# Altium PCB PCB.PcbDoc
Units mm, origin at the board's own origin, x right, y up, seen from the top; angles counter-clockwise.
Board outline 100 x 47.5 mm, 4 copper layers (Top Layer, 3V3, GND, Bottom Layer), stack 0.569 mm thick; 123 components, 61 nets, 455 pads, 146 vias.
Unrouted connection lines stored in the file: 1.
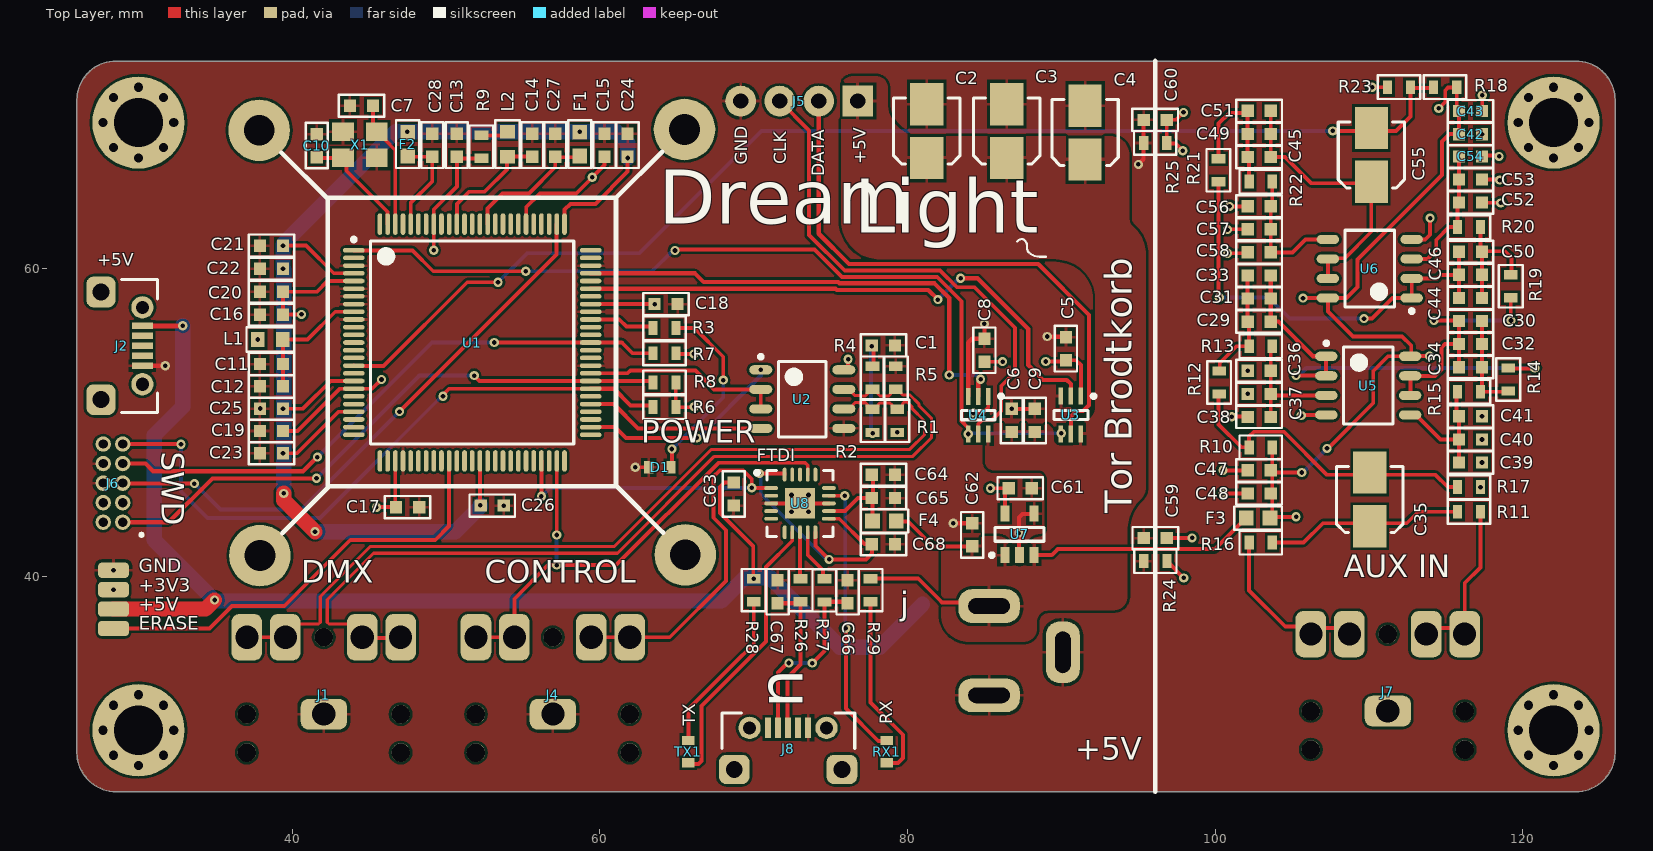
[diagram p0: Top Layer view]
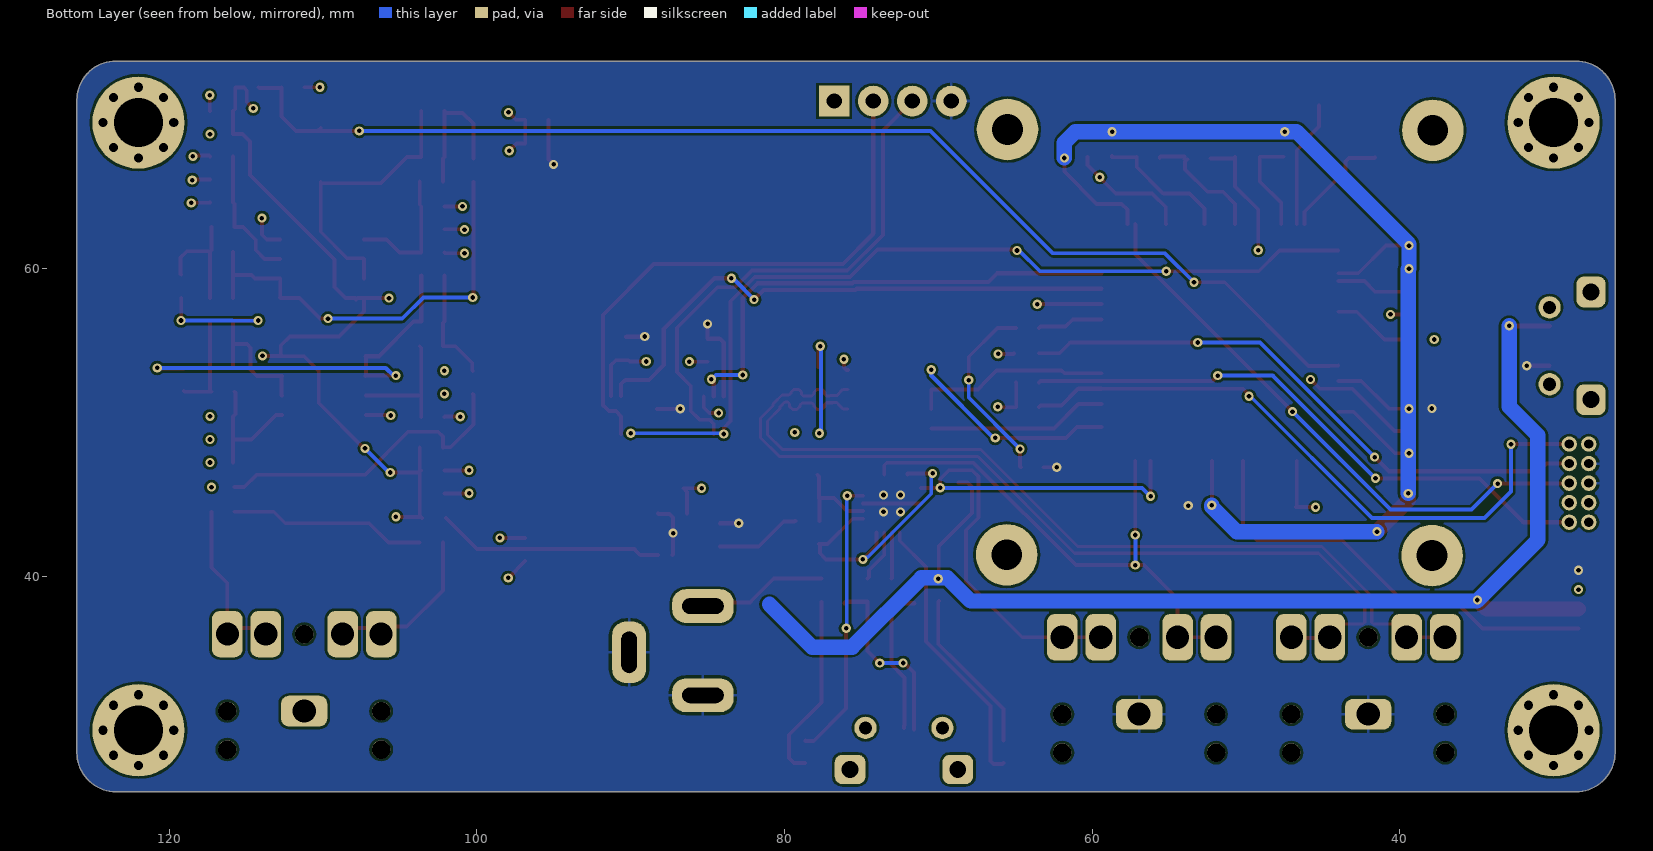
[diagram p1: Bottom Layer view, seen from below]
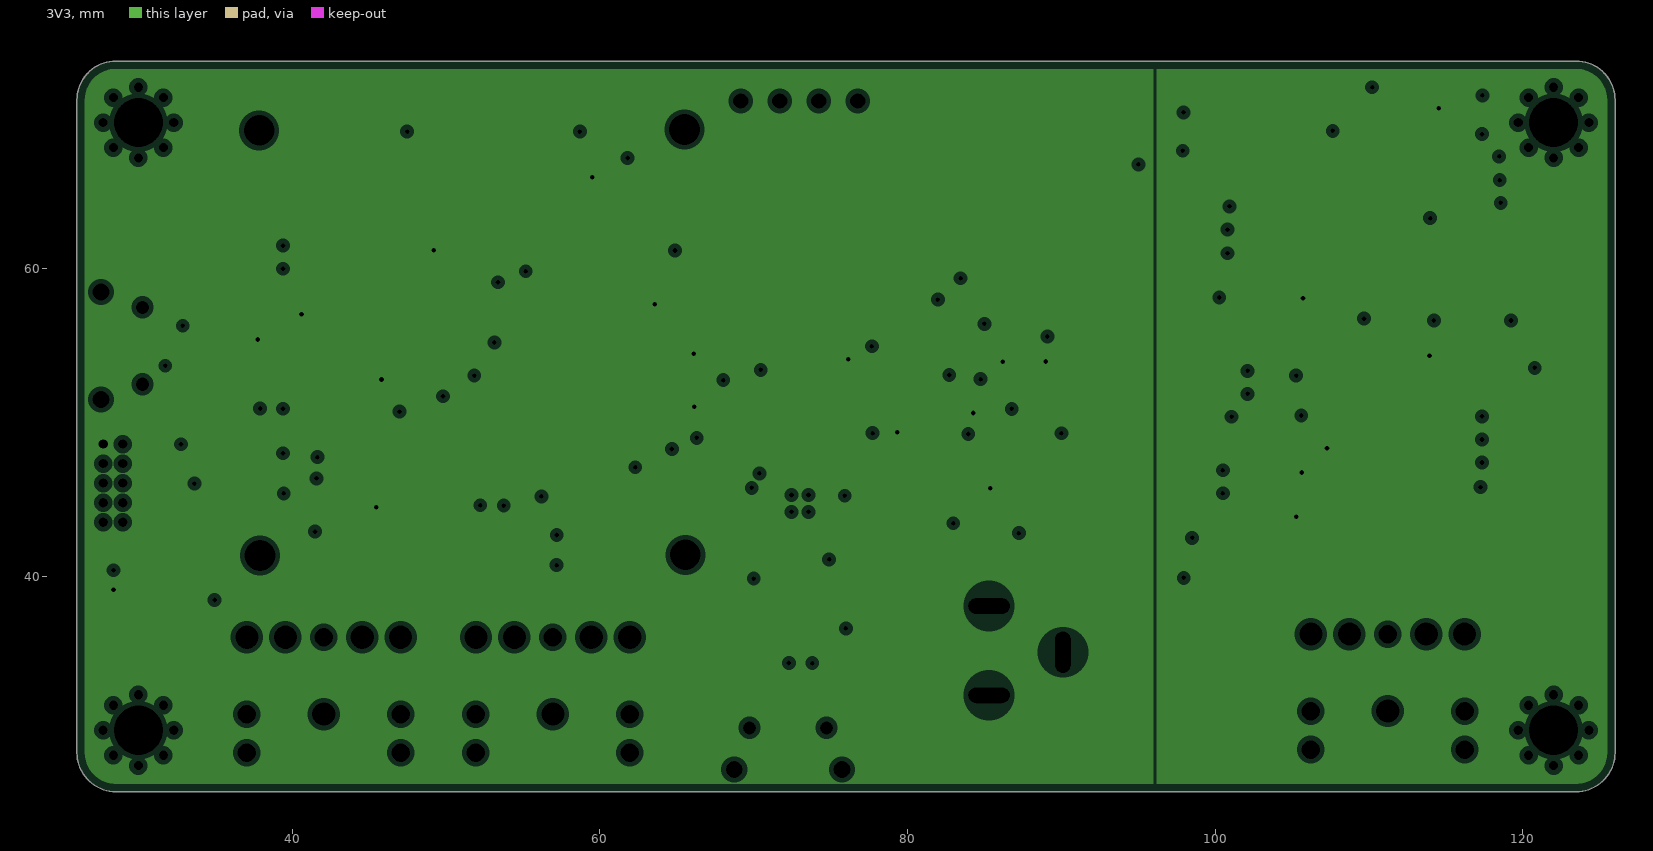
[diagram p2: 3V3, clearances drawn from the general rule]
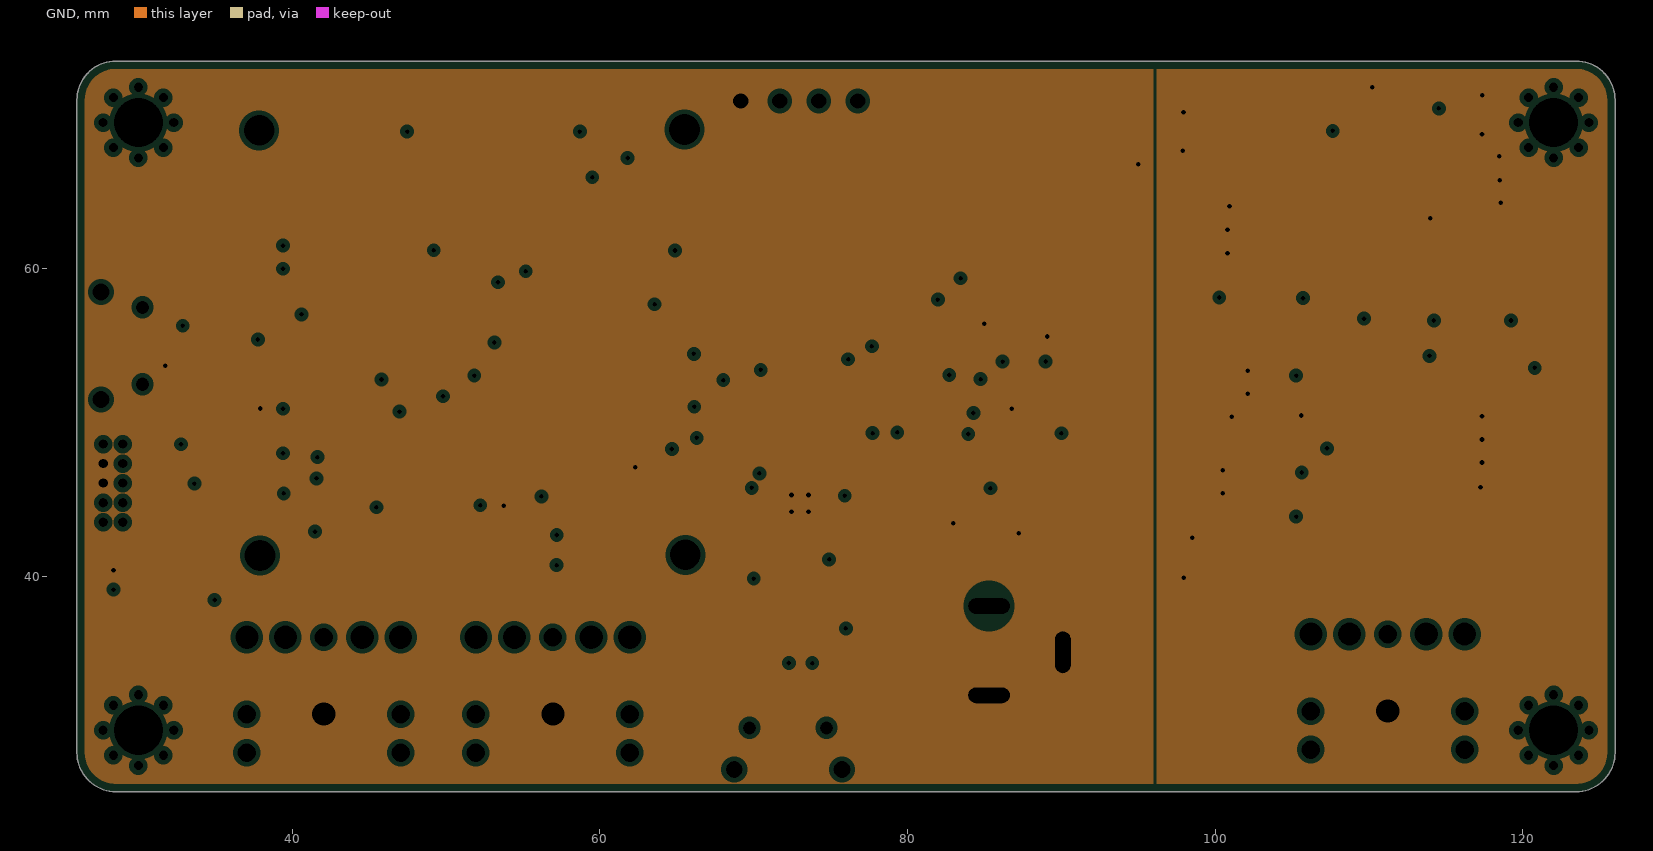
[diagram p3: GND, clearances drawn from the general rule]
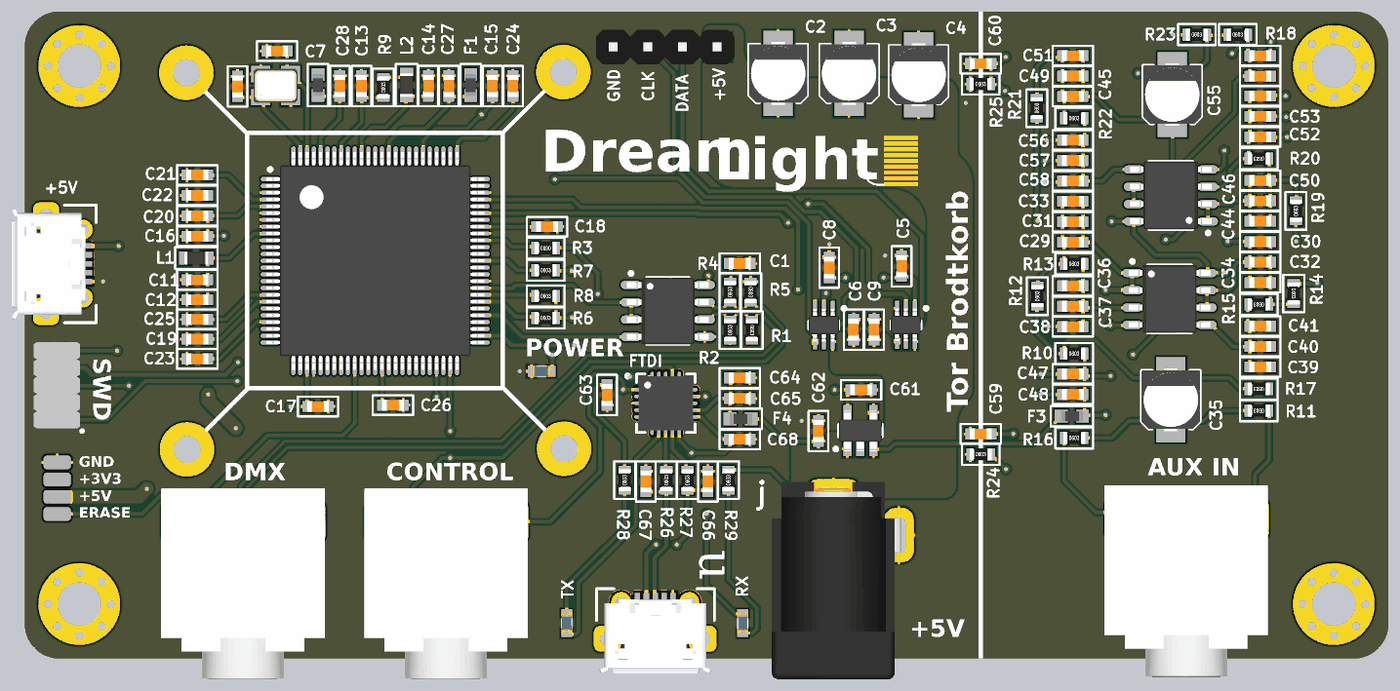
[diagram p4: 3D render of the assembled board from above, using the file's embedded part models]

## Layer stack, top to bottom
Top Solder: solder mask 0.0102, Solder Resist, Dk 3.5
Top Layer: signal copper 0.0356
Dielectric 2: prepreg 0.0711, PP-006, Dk 4.1
3V3: plane copper 0.0178, net (Multiple Nets)
Dielectric 1: dielectric 0.32, FR-4, Dk 4.8
GND: plane copper 0.0178, net (Multiple Nets)
Dielectric 3: prepreg 0.0711, PP-006, Dk 4.1
Bottom Layer: signal copper 0.0356
Bottom Solder: solder mask 0.0102, Solder Resist, Dk 3.5

## Board outline
123.46,26 ccw(c123.46,28.54) 126,28.54 126,70.96 ccw(c123.46,70.96) 123.46,73.5 28.54,73.5 ccw(c28.54,70.96) 26,70.96 26,28.54 ccw(c28.54,28.54) 28.54,26

## Design rules (kind name [scope] priority, off if disabled: settings)
Clearance [All] p1: gap=0.16 ignorepadtopadclearanceinfootprint=FALSE except(0: Arc-Text Arc-Hole Track-Text Track-Hole SMDPad-Text SMDPad-Hole THPad-Text THPad-Hole Via-Text Via-Hole Fill-Text Fill-Hole Poly-Text Poly-Hole Region-Text Region-Hole Text-Text Text-Hole)
DiffPairsRouting [All] p1: maxlimit=0.254 minlimit=0.254 mostfreqgap=0.254 toplayer_minwidth=0.16 toplayer_maxwidth=0.381 toplayer_prefwidth=0.2 bottomlayer_minwidth=0.16 bottomlayer_maxwidth=0.381 bottomlayer_prefwidth=0.2 maxuncoupledlength=12.7
Height [All] p1: minheight=0 maxheight=200 prefheight=12.7
HoleSize [All] p1: absolutevalues=TRUE maxlimit=6.35 minlimit=0.3 maxpercent=80.000 minpercent=20.000
MinimumSolderMaskSliver [All] p1: minsoldermaskwidth=0.1
PlaneClearance [All] p1: clearance=0.3
PlaneConnect [All] p1: planeconnectstyle=Relief reliefexpansion=0.508 reliefentries=4 reliefconductorwidth=1 reliefairgap=0.254
PolygonConnect PolygonConnect_1 [IsVia] p1: connectstyle=Direct reliefconductorwidth=0.254 reliefentries=4 polygonreliefangle="90 Angle" airgapwidth=0.254
PolygonConnect [All] p2: connectstyle=Relief reliefconductorwidth=0.2 reliefentries=4 polygonreliefangle="90 Angle" airgapwidth=0.2
RoutingVias [All] p1: holewidth=0.3 width=0.6 viastyle="Through Hole" minholewidth=0.3 minwidth=0.6 maxholewidth=6.35 maxwidth=10
SilkToSolderMaskClearance [IsPad] p1: minsilkscreentomaskgap=0.178 clearancetoexposedcopper=TRUE
SolderMaskExpansion [All] p1: expansion=0.102
Width [All] p1: maxlimit=5 minlimit=0.16 preferedwidth=0.25 minimp=50.000000 maximp=50.000000 favimp=50.000000
23 further rules are at their usual default settings.

## Classes and differential pairs
net class SWD: NetJ6_2 NetJ6_4 NetJ6_6 NetJ6_10
component class "[08] - FTDI": C63 C64 C65 C66 C67 C68 F4 J8 R26 R27 R28 R29 RX1 TX1 U8
component class "[07] - POWER": C61 C62 U7
component class "[06] - AUDIO": C29 C30 C31 C32 C33 C34 C35 C36 C37 C38 C39 C40 C41 C42 C43 C44 C45 C46 C47 C48 C49 C50 C51 C52 C53 C54 C55 C56 C57 C58 C59 C60 F3 J7 R10 R11 R12 R13 R14 R15 R16 R17 R18 R19 R20 R21 R22 R23 R24 R25 U5 U6
component class "[05] - CPU - POWER": C13 C14 C15 C16 C17 C18 C19 C20 C21 C22 C23 C24 C25 C26 C27 C28 F1 F2 L2 R9 U1
component class "[04] - CPU - SIGNAL, USB, JTAG": C11 C12 J6 L1 R6 R7 R8
component class "[03] - CPU - IO": C1 C2 C3 C4 C5 C6 C7 C8 C9 C10 D1 j J1 J2 J4 J5 R1 R2 R3 R4 R5 U2 U3 U4 X1
differential pair DMX: +DMX_P -DMX_N

## Components (designator, comment, footprint, x,y, rotation, side; value= is the part's Value field where it differs from the comment)
C1 "02016D104KAT2A" C0603 78.43,55.01 r180 top value=100nF
C2 "EEE1HA2R2SR" "Capacitor electrolytic SMD 4x5.4" 81.25,68.95 r90 top value=10uF
C3 "EEE1HA2R2SR" "Capacitor electrolytic SMD 4x5.4" 86.45,68.95 r90 top value=10uF
C4 "EEE1HA2R2SR" "Capacitor electrolytic SMD 4x5.4" 91.55,68.85 r90 top value=10uF
C5 "02016D104KAT2A" C0603 90.3,54.8 r270 top value=100nF
C6 "02016D104KAT2A" C0603 86.78,50.14 r90 top value=100nF
C7 "02016D104KAT2A" C0603 44.5,70.6 r180 top
C8 "02016D104KAT2A" C0603 85,54.7 r270 top value=100nF
C9 "02016D104KAT2A" C0603 88.28,50.14 r90 top value=100nF
C10 "02016D104KAT2A" C0603 41.6,68 r90 top
C11 "02016D104KAT2A" C0603 38.65,52.35 r0 top value=100nF
C12 "02016D104KAT2A" C0603 38.65,53.8 r0 top value=100nF
C13 "02016D104KAT2A" C0603 50.7,68.03 r270 top value=100nF
C14 "02016D104KAT2A" C0603 55.6,68.03 r270 top value=4.7uF
C15 "02016D104KAT2A" C0603 60.3,68.03 r270 top value=100nF
C16 "02016D104KAT2A" C0603 38.65,57 r0 top value=100nF
C17 "02016D104KAT2A" C0603 47.5,44.5 r180 top value=100nF
C18 "02016D104KAT2A" C0603 64.3,57.7 r180 top value=100nF
C19 "02016D104KAT2A" C0603 38.65,49.45 r0 top value=4.7uF
C20 "02016D104KAT2A" C0603 38.65,58.5 r0 top value=100nF
C21 "02016D104KAT2A" C0603 38.65,61.5 r0 top value=1uF
C22 "02016D104KAT2A" C0603 38.65,60 r0 top value=100nF
C23 "02016D104KAT2A" C0603 38.65,48 r0 top value=100nF
C24 "02016D104KAT2A" C0603 61.8,68.03 r270 top value=100nF
C25 "02016D104KAT2A" C0603 38.65,50.9 r0 top value=100nF
C26 "02016D104KAT2A" C0603 53,44.6 r180 top value=100nF
C27 "02016D104KAT2A" C0603 57.1,68.03 r270 top value=100nF
C28 "02016D104KAT2A" C0603 49.1,68.03 r270 top value=100nF
C29 "02016D104KAT2A" C0603 102.86,56.56 r0 top value=100nF
C30 "02016D104KAT2A" C0603 116.6,56.6 r180 top value=100nF
C31 "02016D104KAT2A" C0603 102.86,58.06 r0 top value=100nF
C32 "02016D104KAT2A" C0603 116.6,55.1 r180 top value=100nF
C33 "02016D104KAT2A" C0603 102.86,59.56 r0 top value=100nF
C34 "02016D104KAT2A" C0603 116.6,53.6 r180 top value=100nF
C35 "EEE1HA2R2SR" "Capacitor electrolytic SMD 4x5.4" 110.05,45 r90 top value=10uF
C36 "02016D104KAT2A" C0603 102.86,53.36 r0 top value=100nF
C37 "02016D104KAT2A" C0603 102.86,51.86 r0 top value=100nF
C38 "02016D104KAT2A" C0603 102.86,50.36 r0 top value=100nF
C39 "02016D104KAT2A" C0603 116.6,47.4 r180 top value=100nF
C40 "02016D104KAT2A" C0603 116.6,48.9 r180 top value=100nF
C41 "02016D104KAT2A" C0603 116.6,50.4 r180 top value=100nF
C42 "02016D104KAT2A" C0603 116.6,68.75 r180 top value=100nF
C43 "02016D104KAT2A" C0603 116.6,70.25 r180 top value=100nF
C44 "02016D104KAT2A" C0603 116.6,58.1 r180 top value=100nF
C45 "02016D104KAT2A" C0603 102.86,67.26 r0 top value=100nF
C46 "02016D104KAT2A" C0603 116.6,59.6 r180 top value=100nF
C47 "02016D104KAT2A" C0603 102.86,46.89 r0 top value=100nF
C48 "02016D104KAT2A" C0603 102.86,45.39 r0 top value=100nF
C49 "02016D104KAT2A" C0603 102.86,68.76 r0 top value=100nF
C50 "02016D104KAT2A" C0603 116.6,61.1 r180 top value=100nF
C51 "02016D104KAT2A" C0603 102.86,70.26 r0 top value=100nF
C52 "02016D104KAT2A" C0603 116.6,64.3 r180 top value=100nF
C53 "02016D104KAT2A" C0603 116.6,65.8 r180 top value=100nF
C54 "02016D104KAT2A" C0603 116.6,67.3 r180 top value=100nF
C55 "EEE1HA2R2SR" "Capacitor electrolytic SMD 4x5.4" 110.15,67.4 r90 top value=10uF
C56 "02016D104KAT2A" C0603 102.86,64.06 r0 top value=100nF
C57 "02016D104KAT2A" C0603 102.86,62.56 r0 top value=100nF
C58 "02016D104KAT2A" C0603 102.86,61.06 r0 top value=100nF
C59 "02016D104KAT2A" C0603 96.11,42.49 r0 top value=100nF
C60 "02016D104KAT2A" C0603 96.1,69.67 r0 top value=100nF
C61 "02016D104KAT2A" C0603 87.33,45.73 r180 top value=100nF
C62 "02016D104KAT2A" C0603 84.2,42.7 r270 top value=100nF
C63 "02016D104KAT2A" C0603 68.7,45.35 r90 top value=100nF
C64 "02016D104KAT2A" C0603 78.43,46.6 r180 top value=100nF
C65 "02016D104KAT2A" C0603 78.43,45.09 r180 top value=100nF
C66 "02016D104KAT2A" C0603 76.1,39 r270 top value=47pF
C67 "02016D104KAT2A" C0603 71.55,39 r270 top value=47pF
C68 "02016D104KAT2A" C0603 78.43,42.09 r180 top value=100nF
D1 "LED Blue" "L0603 BLUE" 63.9,47.09 r180 top
F1 "BLM18AG121SN1D" "Ferrite bead 0603" 58.7,68.1 r270 top value="470R @ 100MHz"
F2 "BLM18AG121SN1D" "Ferrite bead 0603" 47.5,68.1 r270 top value="470R @ 100MHz"
F3 "BLM18AG121SN1D" "Ferrite bead 0603" 102.79,43.79 r0 top value="470R @ 100MHz"
F4 "BLM18AG121SN1D" "Ferrite bead 0603" 78.5,43.6 r180 top value="470R @ 100MHz"
j "DC jack" "DC power jack" 90.1,24.466 r90 top
J1 "Audio Jack" "AUDIO JACK FLAT" 47.05,36.041 r90 top
J2 "USB micro" "USB micro" 28.06,54.97 r270 top
J4 "Audio Jack" "AUDIO JACK FLAT" 61.94,36.041 r90 top
J5 "349873-345-34_3" "HEADER 1X4 MALE" 69.15,70.9 r270 top
J6 "123-34-2234_11_1" "HEADER 2X5 MALE 1.27MM" 27.71,43.52 r0 top
J7 "Audio Jack" "AUDIO JACK FLAT" 116.22,36.24 r90 top
J8 "USB micro" "USB MICRO" 72.25,27.95 r0 top
L1 "MLZ1608A2R2WT" "Inductor 0603" 38.58,55.4 r0 top value=10mH
L2 "MLZ1608A2R2WT" "Inductor 0603" 54,68.1 r270 top value=10mH
R1 "CPF-A-0603B100KE1" R0603 79.33,50.11 r270 top value=1k
R2 "CPF-A-0603B100KE1" R0603 77.73,50.11 r90 top value=1k
R3 "CPF-A-0603B100KE1" R0603 64.2,56.135 r180 top value=1k
R4 "CPF-A-0603B100KE1" R0603 77.73,52.91 r90 top value=1k
R5 "CPF-A-0603B100KE1" R0603 79.23,52.91 r270 top value=1k
R6 "CPF-A-0603B100KE1" R0603 64.2,51 r0 top value=1k
R7 "CPF-A-0603B100KE1" R0603 64.2,54.5 r0 top value=1k
R8 "CPF-A-0603B100KE1" R0603 64.2,52.6 r0 top value=1k
R9 "CPF-A-0603B100KE1" R0603 52.3,67.93 r90 top value=1k
R10 "CPF-A-0603B100KE1" R0603 102.96,48.38 r0 top value=1k
R11 "CPF-A-0603B100KE1" R0603 116.5,44.2 r180 top value="0 Ohm"
R12 "CPF-A-0603B100KE1" R0603 100.26,52.6 r90 top value=1k
R13 "CPF-A-0603B100KE1" R0603 102.96,54.96 r0 top value=1k
R14 "CPF-A-0603B100KE1" R0603 119.05,52.8 r270 top value=1k
R15 "CPF-A-0603B100KE1" R0603 116.5,52 r180 top value=1k
R16 "CPF-A-0603B100KE1" R0603 102.96,42.19 r0 top value="0 Ohm"
R17 "CPF-A-0603B100KE1" R0603 116.5,45.8 r180 top value=1k
R18 "CPF-A-0603B100KE1" R0603 114.95,71.8 r0 top value=1k
R19 "CPF-A-0603B100KE1" R0603 119.22,58.86 r90 top value=1k
R20 "CPF-A-0603B100KE1" R0603 116.5,62.7 r180 top value=1k
R21 "CPF-A-0603B100KE1" R0603 100.22,66.4 r90 top value=1k
R22 "CPF-A-0603B100KE1" R0603 102.96,65.66 r0 top value=1k
R23 "CPF-A-0603B100KE1" R0603 111.95,71.8 r0 top value=1k
R24 "CPF-A-0603B100KE1" R0603 96.11,40.99 r0 top value=1k
R25 "CPF-A-0603B100KE1" R0603 96.1,68.17 r0 top value=1k
R26 "CPF-A-0603B100KE1" R0603 73.05,39.1 r90 top value=1k
R27 "CPF-A-0603B100KE1" R0603 74.6,39.09 r90 top value=1k
R28 "CPF-A-0603B100KE1" R0603 70,39.1 r90 top value=1k
R29 "CPF-A-0603B100KE1" R0603 77.6,39.1 r90 top value=1k
RX1 "LED Blue" "L0603 BLUE" 78.65,28.6 r90 top
TX1 "LED Blue" "L0603 BLUE" 65.75,28.6 r270 top
U1 "Cortex-M7 @ 300 MHz" ATSAMS70N19A-AN 51.7,55.2 r0 top
U2 "RS485 tranciever" SP3485EN 73.16,51.52 r0 top
U3 "Level shifter" ADG3301BKSZ 90.62,50.49 r270 top
U4 "Level shifter" ADG3301BKSZ 84.6,50.48 r270 top
U5 "LME49721MA/NOPB" LME49721MA/NOPB 109.95,52.4 r0 top
U6 "LME49721MA/NOPB" LME49721MA/NOPB 110.05,60 r180 top
U7 "LDO 3.3V" NCV8161BSN330T1G 87.28,42.73 r90 top
U8 "FTDI" FT231XQ-R 73.01,44.74 r0 top
X1 "12MHz" MCSJK-7U-12.00-12-30-80-B-30 43.3,67.2 r0 top

## Footprints (in the part's own frame and the unit in brackets; to place one, negate y for a bottom-side part, rotate by r counter-clockwise, add the part's x,y. Pads: shape width x height; smd on the part's side, far side on the other; paste and mask are expansions set on the pad)
ADG3301BKSZ [mm] "SOT23, 6-Leads, Body 2,00x2,10mm, Pitch 0,65mm, IPC Low Density"
  rect 1.1x0.3 smd: 1(-1.225,0.65) 2(-1.225,0) 3(-1.225,-0.65) 4(1.225,-0.65) 5(1.225,0) 6(1.225,0.65)
  silkscreen extent -1.35,-1.1 0.3,1.6, body extent -1.2,-1.1 1.2,1.1, height 1.1
ATSAMS70N19A-AN [mm] "TSQFP, 100-Leads, Body 14,00x14,00mm, Pitch 0,50mm, IPC Medium Density"
  oval 1.4x0.3 smd: 1(-7.7,6) 2(-7.7,5.5) 3(-7.7,5) 4(-7.7,4.5) 5(-7.7,4) 6(-7.7,3.5) 7(-7.7,3) 8(-7.7,2.5) 9(-7.7,2) 10(-7.7,1.5) 11(-7.7,1) 12(-7.7,0.5) 13(-7.7,0) 14(-7.7,-0.5) 15(-7.7,-1) 16(-7.7,-1.5) 17(-7.7,-2) 18(-7.7,-2.5) 19(-7.7,-3) 20(-7.7,-3.5) 21(-7.7,-4) 22(-7.7,-4.5) 23(-7.7,-5) 24(-7.7,-5.5) 25(-7.7,-6) 51(7.7,-6) 52(7.7,-5.5) 53(7.7,-5) 54(7.7,-4.5) 55(7.7,-4) 56(7.7,-3.5) 57(7.7,-3) 58(7.7,-2.5) 59(7.7,-2) 60(7.7,-1.5) 61(7.7,-1) 62(7.7,-0.5) 63(7.7,0) 64(7.7,0.5) 65(7.7,1) 66(7.7,1.5) 67(7.7,2) 68(7.7,2.5) 69(7.7,3) 70(7.7,3.5) 71(7.7,4) 72(7.7,4.5) 73(7.7,5) 74(7.7,5.5) 75(7.7,6)
  oval 0.3x1.4 smd: 26(-6,-7.7) 27(-5.5,-7.7) 28(-5,-7.7) 29(-4.5,-7.7) 30(-4,-7.7) 31(-3.5,-7.7) 32(-3,-7.7) 33(-2.5,-7.7) 34(-2,-7.7) 35(-1.5,-7.7) 36(-1,-7.7) 37(-0.5,-7.7) 38(0,-7.7) 39(0.5,-7.7) 40(1,-7.7) 41(1.5,-7.7) 42(2,-7.7) 43(2.5,-7.7) 44(3,-7.7) 45(3.5,-7.7) 46(4,-7.7) 47(4.5,-7.7) 48(5,-7.7) 49(5.5,-7.7) 50(6,-7.7) 76(6,7.7) 77(5.5,7.7) 78(5,7.7) 79(4.5,7.7) 80(4,7.7) 81(3.5,7.7) 82(3,7.7) 83(2.5,7.7) 84(2,7.7) 85(1.5,7.7) 86(1,7.7) 87(0.5,7.7) 88(0,7.7) 89(-0.5,7.7) 90(-1,7.7) 91(-1.5,7.7) 92(-2,7.7) 93(-2.5,7.7) 94(-3,7.7) 95(-3.5,7.7) 96(-4,7.7) 97(-4.5,7.7) 98(-5,7.7) 99(-5.5,7.7) 100(-6,7.7)
  silkscreen extent -7.82,-6.6 6.6,6.82, body extent -8,-8 8,8, height 1.61
"AUDIO JACK FLAT" [mm]
  rrect50% 2x3 hole 1.5: 1(-5,5)
  rrect50% 3x2 hole 1.5: 2(0,0) 3(0,2.5) 4(0,7.5) 5(0,10)
  round 1.2 hole 1.2: ""(-7.5,0) ""(-7.5,10) ""(-5,10) ""(-5,0) ""(0,5)
  body extent -11.57,-0.95 2.47,11.05, height 5.6
C0603 [mm]
  rect 0.8x0.8 smd: 1(-0.75,0) 2(0.75,0)
  silkscreen extent -1.48,-0.72 1.48,0.72, body extent -0.8,-0.4 0.8,0.4, height 0.8
"Capacitor electrolytic SMD 4x5.4" [mm] "Aluminum Electrolytic Capacitor, Body 4.30x4.30x5.40mm, IPC Low Density"
  rect 2.75x2.15 smd: 1(-1.75,0) 2(1.75,0)
  silkscreen extent -2.15,-2.15 2.15,2.15, body extent -2.3,-2.15 2.3,2.15, height 5.4
"DC power jack" [mm]
  rrect80% 2.2x4 hole 2.7 slot 1 at 0 deg paste+0: 1(13.6,4.8) 3(7.8,4.8)
  rrect80% 4x2.2 hole 2.7 slot 1 at 90 deg paste+0: 3(10.6,0)
  body extent 0,-0.19 14.5,9.31, height 10.75
"Ferrite bead 0603" [mm]
  rect 0.95x0.95 smd: 1(-0.775,0) 2(0.775,0)
  silkscreen extent -1.55,-0.75 1.55,0.75, body extent -0.79,-0.4 0.81,0.4, height 0.8
FT231XQ-R [mm] "QFN, 20-Leads, Body 4.00x4.00mm, Pitch 0.50mm, Thermal Pad 1.98x1.98mm, IPC Medium Density"
  oval 0.9x0.25 smd mask+0.202: 1(-1.875,1) 2(-1.875,0.5) 3(-1.875,0) 4(-1.875,-0.5) 5(-1.875,-1) 11(1.875,-1) 12(1.875,-0.5) 13(1.875,0) 14(1.875,0.5) 15(1.875,1)
  oval 0.25x0.9 smd mask+0.202: 6(-1,-1.875) 7(-0.5,-1.875) 8(0,-1.875) 9(0.5,-1.875) 10(1,-1.875) 16(1,1.875) 17(0.5,1.875) 18(0,1.875) 19(-0.5,1.875) 20(-1,1.875)
  rect 1.98x1.98 smd: 21(0,0)
  silkscreen extent -2.92,-2.15 2.15,2.15, body extent -2,-2 2,2, height 0.8
"HEADER 1X4 MALE" [mm]
  rect 2x2 hole 1: 1(0,7.62)
  round 2 hole 1: 2(0,5.08) 3(0,2.54) 4(0,0)
  body extent -1.27,-1.27 1.27,8.89, height 8.89
"HEADER 2X5 MALE 1.27MM" [mm]
  round 1 hole 0.6 mask+0.16: 1(0,5.08) 2(1.27,5.08) 3(0,3.81) 4(1.27,3.81) 5(0,2.54) 6(1.27,2.54) 7(0,1.27) 8(1.27,1.27) 9(0,0) 10(1.27,0)
  body extent -1.05,-0.64 2.35,5.72, height 5.5
"Inductor 0603" [mm]
  rect 0.88x0.99 smd: 1(-0.815,0) 2(0.815,0)
  silkscreen extent -1.55,-0.8 1.55,0.8, body extent -0.87,-0.48 0.87,0.48, height 0.91
"L0603 BLUE" [mm]
  rect 0.6x0.8 smd: 1(-0.725,0) 2(0.725,0)
  body extent -0.8,-0.4 0.8,0.4, height 0.6
LME49721MA/NOPB [mm] "SOIC, 8-Leads, Body 4.91x3.90mm, Pitch 1.27mm, IPC Medium Density"
  oval 1.45x0.6 smd: 1(-2.725,1.905) 2(-2.725,0.635) 3(-2.725,-0.635) 4(-2.725,-1.905) 5(2.725,-1.905) 6(2.725,-0.635) 7(2.725,0.635) 8(2.725,1.905)
  silkscreen extent -2.85,-2.5 1.6,2.88, body extent -3,-2.5 3,2.5, height 1.76
MCSJK-7U-12.00-12-30-80-B-30 [mm]
  rect 1.4x1.2 smd: 1(0,0) 2(2.2,0) 3(2.2,1.7) 4(0,1.7)
  body extent -0.5,-0.4 2.7,2.1, height 1.2
NCV8161BSN330T1G [mm] "SOT23, 5-Leads, Body 3.00x2.75mm, Pitch 0.95mm, IPC Medium Density"
  rect 1.05x0.6 smd: 1(-1.35,0.95) 2(-1.35,0) 3(-1.35,-0.95) 4(1.35,-0.95) 5(1.35,0.95)
  silkscreen extent -1.47,-1.6 0.45,1.92, body extent -1.5,-1.58 1.5,1.58, height 1.1
R0603 [mm]
  rect 0.6x0.9 smd: 1(-0.75,0) 2(0.75,0)
  silkscreen extent -1.38,-0.77 1.38,0.78, body extent -0.8,-0.45 0.8,0.45, height 0.5
SP3485EN [mm] "SOIC, 8-Leads, Body 4,90x3,90mm, Pitch 1,27mm, IPC Medium Density"
  oval 1.5x0.6 smd: 1(-2.7,1.905) 2(-2.7,0.635) 3(-2.7,-0.635) 4(-2.7,-1.905) 5(2.7,-1.905) 6(2.7,-0.635) 7(2.7,0.635) 8(2.7,1.905)
  silkscreen extent -2.82,-2.45 1.55,2.88, body extent -3,-2.45 3,2.45, height 1.75
"USB micro" [mm]
  rrect50% 2x1.9 hole 1.1: 0(-3.517,-0.5) 0(3.483,-0.5)
  round 1.45 hole 0.85: 0(-2.517,2.2) 0(2.483,2.2)
  rect 0.4x1.35 smd mask+0.2: 1(-1.317,2.2) 2(-0.667,2.2) 3(-0.017,2.2) 4(0.633,2.2) 5(1.283,2.2)
  silkscreen extent -4.32,0.85 4.32,3.18, body extent -4.1,-3.03 4.1,2.4, height 0.23
"USB MICRO" [mm]
  rrect50% 2x1.9 hole 1.1: 0(-3.517,-0.5) 0(3.483,-0.5)
  round 1.45 hole 0.85 mask+0.2: 0(-2.517,2.2) 0(2.483,2.2)
  rect 0.4x1.35 smd mask+0.2: 1(-1.317,2.2) 2(-0.667,2.2) 3(-0.017,2.2) 4(0.633,2.2) 5(1.283,2.2)
  silkscreen extent -4.32,0.85 4.32,3.17, body extent -4.1,-3.03 4.1,2.4, height 0.23

## Part data
C1 C5 C6 C7 C8 C9 C10 C11 C12 C13 C14 C15 C16 C17 C18 C19 C20 C21 C22 C23 C24 C25 C26 C27 C28 C29 C30 C31 C32 C33 C34 C36 C37 C38 C39 C40 C41 C42 C43 C44 C45 C46 C47 C48 C49 C50 C51 C52 C53 C54 C56 C57 C58 C59 C60 C61 C62 C63 C64 C65 C66 C67 C68: "C0603"
C2 C3 C4 C35 C55: "El. Capacitor SMD 4x5.4"
D1 RX1 TX1: library part HSMG-C199, "LED 0603 Blue", Color=Blue
F1 F2 F3 F4: "Ferrite bead 0603"
j: library part 694106301002, "DC power jack"
J1 J4 J7: library part FC68133, "Audio jack flat 5 contacts", Supplier Part Number 1=2518190, Supplier 1=Farnell
J2 J8: library part 47590-0001, Supplier Part Number 1=1568022, Supplier 1=Farnell
J5: "Header 1x4 male 2.54mm"
J6: "Header 2x5 male 1.27mm"
L1 L2: "Inductor 0603"
R1 R2 R3 R4 R5 R6 R7 R8 R9 R10 R11 R12 R13 R14 R15 R16 R17 R18 R19 R20 R21 R22 R23 R24 R25 R26 R27 R28 R29: "R0603"
U1: library part ATSAMS70N19A-AN, "ATSAMS70N19", Supplier Part Number 1=2484390, Supplier 1=Farnell
U2: library part SP3485EN, "RS485 tranciever 3V3"
U3 U4: library part ADG3301BKSZ, "Level shifter 1-bit bidirectional"
U5 U6: "Audio OP amp, single supply, low voltage"
U7: library part NCV8161BSN330T1G, "LDO fixed 3.3V 450mA ultra-low noise", Dropout voltage=330mV, Output current=450mA, Output voltage=3.3V, Supplier Part Number 1=2775470, RMS noise="< 100 uVrms", Supplier 1=Farnell
U8: library part FT231XQ-R, "USB to RS-232 converter", Supplier Part Number 1=2081330, Supplier 1=Farnell
X1: library part MCSJK-7U-12.00-12-30-80-B-30, "Crystal 12MHz 3.2mm x 2.5mm", Supplier Part Number 1=2853917, Supplier 1=Farnell

## Free pads (board coordinates)
  rrect50% 2x1 smd mask+0.15: 2(28.38,36.61) 2(28.38,37.873) 2(28.38,39.137) 2(28.38,40.4)
  round 6 hole 3.2: ""(30,30) ""(30,69.5) ""(122,30) ""(122,69.5)
  round 4 hole 2: ""(37.85,69) ""(37.9,41.35) ""(65.5,69.05) ""(65.55,41.4)

## Via types
v1: diameter 0.6, hole 0.3, Top Layer to Bottom Layer, tented both sides, 110 vias
v2: diameter 0.6, hole 0.6, Top Layer to Bottom Layer, tented both sides, 32 vias
v3: diameter 0.6, hole 0.3, Top Layer to Bottom Layer, 4 vias

## Nets (pads, with @x,y where several pads share a name; then routed paths per layer and width w, separated by ;. In a path a pad name is that pad's centre, name@x,y a point inside that pad or via, vN(x,y) a via of type N, cw(c..) or ccw(c..) an arc to the next point about the centre after c; other vN are vias at no path point)
5V: C2.1 C3.1 C4.1 C6.1 C9.1 C62.2 C63.2 F3.1 F4.1 J2.1 J5.1 j.1 pad.2@28.38,37.873 R28.2 R29.2 U3.6 U4.6 U7.1 U7.3 | length 116.1
  Top Layer w0.25: C63.2 68.1,46.1 67.8,45.8 67.8,44.115 69.975,41.94 69.975,39.85 v1(70,39.85) ; R29.2 80.7,39.85 82.1,38.45 82.1,38.446 82.246,38.3 85.066,38.3 j.1 ; F4.1 79.36,43.6 79.39,43.57 80.05,43.57 81.67,41.95 C62.2
  Top Layer w0.27: U7.3 89.38,41.38 89.77,41.77 99.995,41.77 F3.1
  Top Layer w0.33: J2.1 v1(32.883,56.287)
  Top Layer w1: pad.2@28.38,37.873 34.363,37.873 v1(34.95,38.46)
  Bottom Layer w1: v1(32.883,56.287) 32.883,51.033 31.02,49.17 31.02,42.37 34.99,38.4 67.9,38.4 69.4,39.9 71.1,39.9 75.6,35.4 78.2,35.4 80.975,38.175
+5V_AUDIO: C42.2 C43.2 C47.2 C48.2 F3.2 R10.2 R18.2 U5.8 U6.8 | length 51.2
  Top Layer w0.25: F3.2 F3.2@103.637,43.863 ; C47.2 C47.2@103.71,46.79 ; R10.2 C47.2@103.71,46.79 ; v1(105.26,43.88) 105.242,43.863 F3.2@103.637,43.863 ; v1(105.63,46.75) 103.75,46.75 C47.2@103.71,46.79 ; v1(105.71,58.09) 105.715,58.095 U6.8 ; v1@107.27,48.296 v1(107.27,48.32) ; v1@107.3,48.29 110.28,51.27 110.28,53.36 111.225,54.305 U5.8 112.675,54.325 112.68,54.33 v1(113.93,54.33) ; U5.8@112.712,54.362 112.75,54.4 112.75,55 112.15,55.6 108.95,55.6 107.325,57.225 U6.8 ; v1(114.54,70.42) 114.96,70.84 114.96,71.59 115.14,71.77 115.67,71.77 R18.2 115.7,70.4 C43.2 C42.2 115.24,68.75 114.75,68.26 114.75,66.1 109.25,60.6 109.25,58.8 108.545,58.095 107.912,58.095 107.85,58.033 107.85,58 107.755,58.095 U6.8 ; F3.2@103.637,43.863 103.71,43.935 C47.2@103.71,46.79
  Bottom Layer w0.25: v1(105.63,46.75) 105.7,46.75 v1(107.27,48.32)
AGND: C36.1 C37.1 C38.1 C39.1 C40.1 C41.1 C42.1 C43.1 C47.1 C48.1 C52.1 C53.1 C54.1 C56.1 C57.1 C58.1 C59.2 C60.2 J7.1 R17.1 R23.1 R24.2 R25.2 U5.4 U6.4 | length 25.1
  Top Layer w0.25: R24.2 97.95,39.9 v1(97.962,39.9) ; C59.2 96.87,42.5 v1(98.5,42.5) ; v1(97.89,67.67) 97.89,67.68 97.42,68.15 96.87,68.15 R25.2 C60.2 96.863,69.683 97.463,69.683 v1(97.94,70.16) ; v1(100.5,45.4) 100.51,45.39 C48.1 ; v1(100.5,46.9) 100.52,46.88 102.1,46.88 C47.1 ; v1(100.8,61) 102.05,61 C58.1 ; v1(100.8,62.54) 100.82,62.56 C57.1 ; v1@100.94,64.06 v1(100.93,64.05) 101.59,64.05 ; v1(101.073,50.373) 101.09,50.39 102.08,50.39 C38.1 ; 101.61,64.05 102.1,64.05 C56.1 ; v1(105.6,50.46) 105.62,50.48 107.21,50.48 U5.4 ; v1(110.2,71.8) R23.1 ; U6.4 113.655,61.905 113.96,62.21 113.96,63.28 v1(113.97,63.29) ; C52.1 117.36,64.29 118.41,64.29 118.42,64.28 v1(118.57,64.28) ; C53.1 118.37,65.8 118.41,65.76 v1(118.5,65.76) ; C54.1 117.4,67.35 118.41,67.35 v1(118.46,67.3) ; C43.1 117.36,70.26 117.36,71.26 v1(117.37,71.27)
  Bottom Layer w0.25: v1(110.2,71.8) v1@110.3,71.9
  other v1: 117.25,45.8 117.35,47.4 117.35,48.9 117.35,50.4 102.11,51.86 102.11,53.36 117.35,68.75
CP_RX: J4.4 J4.5 U1.49 U8.17 | length 35.2
  Top Layer w0.25: J4.5 J4.4 54.44,38.54 56.63,40.73 v1(57.19,40.73) 61.05,40.73 67.7,47.38 73.35,47.38 73.51,47.22 U8.17 ; v1(57.2,42.69) U1.49
  Bottom Layer w0.25: v1(57.19,40.73) 57.19,42.68 v1(57.2,42.69)
CP_TX: J4.2 J4.3 U1.47 U8.1 | length 38.3
  Top Layer w0.25: v1(56.2,45.2) U1.47 ; J4.3 J4.2 64.541,36.041 68.2,39.7 68.2,43 67.39,43.81 67.39,46.49 67.8,46.9 69.3,46.9 69.875,46.325 69.87,46.32 69.875,46.315 v1(69.875,45.754) 69.875,45.745 69.88,45.74 U8.1
  Bottom Layer w0.25: v1(56.2,45.2) 56.754,45.754 v1(69.875,45.754)
CPU_3V3: C5.2 C8.2 C13.2 C15.2 C16.2 C17.2 C18.2 C19.2 C20.2 C61.2 J6.1 L1.1 pad.2@28.38,39.137 R1.2 R6.2 R7.2 R8.2 R9.1 U1.5 U1.19 U1.28 U1.68 U1.81 U1.93 U2.8 U3.1 U4.1 U7.5 | length 55
  Top Layer w0.25: L1.1@37.74,55.36 37.765,55.385 v1(37.765,55.4) ; C19.2 40.35,49.45 43.1,52.2 U1.19 45.2,52.2 v1(45.8,52.8) ; C16.2 39.42,57.02 40.59,57.02 v1(40.6,57.03) ; 39.4,57.4 C20.2 41.6,58.5 42.3,59.2 U1.5 ; v1(45.47,44.49) 45.48,44.5 C17.2 46.7,44.55 U1.28 ; v1(49.2,61.2) U1.93 49.2,63.84 50.7,65.34 C13.2 50.82,67.16 52.27,67.16 52.29,67.18 R9.1 ; U1.81 55.2,62.93 55.21,62.94 55.21,64.01 56.1,64.9 58.46,64.9 60.3,66.74 C15.2 ; U1.68 63.45,57.7 C18.2@63.55,57.6 ; C18.2 v1(63.56,57.69) ; R8.2 64.93,52.58 64.93,51.02 R6.2 64.96,50.99 66.13,50.99 v1(66.13,51.03) ; R7.2@65.08,54.5 65.12,54.46 v1(66.11,54.46) ; U2.8 75.976,53.425 76.138,53.587 v1(76.138,54.11) ; v1(84.28,50.62) 84.89,50.62 85.25,50.98 U4.1 ; C8.2 86.18,53.95 v1(86.18,53.96) ; v1(85.39,45.73) C61.2 86.33,45.48 U7.5 ; v1(88.98,53.97) 90.06,53.97 90.14,54.05 C5.2 90.95,54.05 91.27,53.73 U3.1
  Bottom Layer w0.25: v1@85.36,45.7 v1(85.39,45.73)
  other v1: 28.38,39.137 79.33,49.36 59.5,65.95
DMX_N: J1.2 J1.3 R4.1 R5.2 U2.7 | length 59.1
  Top Layer w0.2: J1.3 43.69,36.901 42.394,36.901 42.277,37.018 42.277,38.5 45.277,41.5 61.142,41.5 67.442,47.8 80.342,47.8 81.554,49.012 81.554,50.288 80.734,51.108 80.734,51.216 80.163,51.787 79.697,51.787 79.58,51.904 79.58,51.96 79.38,52.16 R5.2 79.08,52.16 78.88,51.96 78.88,51.833 78.763,51.716 78.556,51.716 78.551,51.721 78.213,51.721 78.08,51.854 78.08,51.96 77.88,52.16 R4.1 77.58,52.16 77.38,51.96 77.38,51.854 77.263,51.737 77.027,51.737 77.017,51.747 76.585,51.747 76.468,51.864 76.468,51.889 76.202,52.155 U2.7
  Top Layer w0.25: J1.3 44.591,36 47.009,36 J1.2
DMX_P: J1.4 J1.5 R1.1 R2.2 U2.6 | length 58.3
  Top Layer w0.2: J1.4 40.41,36.901 41.706,36.901 41.823,37.018 41.823,38.688 45.089,41.954 60.954,41.954 67.254,48.254 80.154,48.254 81.1,49.2 81.1,50.1 80.28,50.92 80.28,51.028 79.975,51.333 79.797,51.333 79.68,51.216 79.68,51.06 79.48,50.86 R1.1 79.18,50.86 78.98,51.06 78.98,51.145 78.863,51.262 78.368,51.262 78.363,51.267 78.197,51.267 78.08,51.15 78.08,51.06 77.88,50.86 R2.2 77.58,50.86 77.38,51.06 77.38,51.166 77.263,51.283 76.839,51.283 76.829,51.293 76.585,51.293 76.468,51.176 76.468,51.151 76.202,50.885 U2.6
  Top Layer w0.25: J1.5 J1.4
GND: C1.1 C2.2 C3.2 C4.2 C5.1 C6.2 C7.2 C8.1 C9.2 C10.2 C11.1 C12.1 C13.1 C14.1 C15.1 C16.1 C17.1 C18.1 C19.1 C20.1 C21.1 C22.1 C23.1 C24.1 C25.1 C26.1 C27.1 C28.1 C59.1 C60.1 C61.1 C62.1 C63.1 C64.1 C65.1 C66.1 C67.1 C68.1 D1.2 J1.1 J2.5 J4.1 J5.4 J6.3 J6.5 J8.5 j.3 pad.2@28.38,40.4 R5.1 R24.1 R25.1 U1.3 U1.6 U1.7 U1.8 U1.10 U1.29 U1.60 U1.67 U1.73 U2.5 U3.3 U4.3 U7.2 U7.4 U8.3 U8.13 U8.21 X1.2 X1.4 | length 22.6
  Top Layer w0.25: v1(62.3,47.09) D1.2 ; U8.3 71.77,44.74 71.773,44.737 73.007,44.737 U8.21 U8.13 ; v1(86.78,50.89) C9.2
  Top Layer w0.27: J2.5 v1(31.743,53.687) ; C25.1 37.96,50.9 37.92,50.9 v1(37.91,50.91) ; v1(82.97,43.45) C62.1 ; U4.3 83.95,52.72 83.95,55.19 84.21,55.45 C8.1 v1(85,56.41) ; U7.2 87.24,41.42 v1(87.24,42.81) 87.24,43.82 87.47,44.05 88.2,44.05 U7.4 ; v1(89.09,55.59) 89.1,55.58 90.29,55.58 90.3,55.57 C5.1 ; v1(95.01,66.779) 95.35,67.119 R25.1 C60.1
  Bottom Layer w0.25: v1@62.25,47.04 v1(62.3,47.09)
  Bottom Layer w0.27: v1@82.95,43.47 v1(82.97,43.45) ; v1@87.17,42.88 v1(87.24,42.81)
  other v1: 28.38,40.4 53.75,44.6
  other v3: 72.46,44.19 73.56,44.19 72.46,45.29 73.56,45.29
NetC1_2: C1.2 R2.1 R4.2 | length 7.3
  Top Layer w0.25: v1(77.68,54.96) C1.2 77.78,54.91 77.78,53.61 R4.2 ; v1(77.73,49.31) R2.1
  Bottom Layer w0.25: v1(77.68,54.96) 77.63,54.91 77.63,49.41 v1(77.73,49.31)
NetC7_1: C7.1 U1.98 X1.3 | length 8.3
  Top Layer w0.25: C7.1 45.25,69.25 46.075,68.425 46.075,68.328 46.7,67.703 U1.98
NetC10_1: C10.1 U1.99 X1.1 | length 7.2
  Top Layer w0.25: C10.1 41.65,67.2 X1.1 43.529,66.971 43.529,66.371 46.2,63.7 U1.99
NetC11_2: C11.2 C12.2 L1.2 U1.9 | length 8.4
  Top Layer w0.25: C11.2 39.4,52.6 C12.2 39.4,55.395 L1.2 41,55.4 41.095,55.495 42.8,57.2 U1.9
NetC14_2: C14.2 L2.2 U1.90 | length 8.3
  Top Layer w0.25: U1.90 50.7,64.2 51.5,65 52.5,65 53.96,66.46 53.96,66.94 53.78,67.12 54,67.12 L2.2 55.515,67.285 55.6,67.2 C14.2
NetC29_1: C29.1 C31.1 C33.1 R12.2 R13.1 | length 7.5
  Top Layer w0.25: R12.2 100.299,53.389 100.299,53.879 101.38,54.96 R13.1 102.21,56.46 C29.1 C31.1 C33.1
NetC29_2: C29.2 C31.2 C33.2 R14.1 U5.1 U5.2 | length 28.3
  Top Layer w0.27: C33.2 C29.2 104.11,56.56 106.36,54.31 107.22,54.31 U5.1 107.21,54.29 U5.2@107.21,53.05 ; v1(105.26,53.05) U5.2@107.21,53.05 ; U5.2 U5.2@107.21,53.05 ; R14.1 119.08,53.52 120.75,53.52 v1(120.78,53.55)
  Bottom Layer w0.27: v1(105.26,53.05) 105.418,53.05 105.918,53.55 v1(120.78,53.55)
NetC30_1: C30.1 C32.1 C34.1 R14.2 R15.1 | length 6.5
  Top Layer w0.25: C30.1 C34.1 117.35,52.1 R15.1 119,52 R14.2
NetC30_2: C30.2 C32.2 C34.2 R19.1 U5.6 U5.7 | length 17.3
  Top Layer w0.25: U5.6 112.688,51.765 U5.7@112.688,53.035 ; U5.7 U5.7@112.688,53.035 ; v1(114.22,56.63) 115.82,56.63 C30.2 C32.2 ; C34.2 C32.2 ; R19.1 119.22,56.64 v1(119.23,56.63) ; U5.7@112.688,53.035 114.305,53.035 114.71,53.44 114.71,54.86 114.95,55.1 C32.2
  Bottom Layer w0.25: v1(114.22,56.63) 114.23,56.62 115.89,56.62 115.9,56.63 v1(119.23,56.63)
NetC35_1: C35.1 R11.2 R16.2 | length 12.9
  Top Layer w0.25: R16.2 105.74,42.19 107,43.45 112.45,43.45 113.2,44.2 R11.2
NetC35_2: C35.2 R10.1 R12.1 R17.2 | length 20.5
  Top Layer w0.25: R12.1 100.22,51.81 100.22,49.88 101.71,48.39 102.2,48.39 R10.1 102.21,49.09 102.52,49.4 104.48,49.4 107.28,46.6 114.32,46.6 115.12,45.8 R17.2
NetC36_2: C36.2 C37.2 C38.2 R13.2 U5.3 | length 8.3
  Top Layer w0.25: C38.2 C37.2 ; R13.2 103.61,54.86 C36.2 C37.2 ; U5.3 103.705,51.765 C37.2
NetC39_2: C39.2 C40.2 C41.2 R15.2 U5.5 | length 8.5
  Top Layer w0.25: U5.5 113.055,50.495 114.65,48.9 C40.2 ; R15.2 115.69,51.94 115.69,50.56 C41.2 C40.2 ; C39.2 C40.2
NetC44_1: C44.1 C46.1 C50.1 R19.2 R20.1 | length 7.9
  Top Layer w0.25: R20.1 117.25,61.2 C50.1 ; C44.1 C46.1 C50.1 ; R19.2 119.26,59.65 119.26,60.73 118.86,61.13 117.38,61.13 C50.1
NetC44_2: C44.2 C46.2 C50.2 R21.1 U6.1 U6.2 | length 28.7
  Top Layer w0.25: R21.1 100.22,62.787 100.215,62.782 100.215,62.298 100.22,62.293 100.22,61.247 100.215,61.242 100.215,60.758 100.22,60.753 100.22,58.17 v1(100.26,58.13) ; v1(109.675,56.755) 110.185,56.755 111.525,58.095 U6.1 ; U6.1@112.805,58.125 U6.1 ; C44.2@115.845,58.095 C44.2 C46.2 ; C50.2 C46.2 ; U6.1 U6.2 114.415,59.365 114.65,59.6 C46.2
  Bottom Layer w0.25: v1(100.26,58.13) 103.47,58.13 104.845,56.755 v1(109.675,56.755)
NetC45_1: C45.1 C49.1 C51.1 R21.2 R22.1 | length 9.2
  Top Layer w0.25: R21.2 100.22,69.43 100.92,70.13 101.98,70.13 C51.1 102.11,70.1 C49.1 C45.1 102.21,67.16 R22.1
NetC45_2: C45.2 C49.2 C51.2 C55.1 U6.6 U6.7 | length 18.4
  Top Layer w0.25: C51.2 C49.2 C45.2 104.53,67.26 106.23,65.56 110.06,65.56 C55.1 110.15,62.4 108.425,60.675 107.365,60.675 U6.6 U6.7
NetC52_2: C52.2 C53.2 C54.2 R20.2 U6.3 | length 8.9
  Top Layer w0.25: U6.3 113.795,60.635 114.37,61.21 114.37,61.87 115.2,62.7 R20.2 115.75,64.2 C52.2 C53.2 C54.2
NetC55_2: C55.2 R18.1 R23.2 U1.16 | length 79.3
  Top Layer w0.25: U1.16 44.01,53.69 44.595,53.69 44.605,53.68 45.94,53.68 51.38,59.12 v1(53.38,59.12) ; v1(107.64,68.96) 110.24,68.96 110.15,69.05 C55.2 110.35,68.95 111.76,68.95 112.7,69.89 R23.2 112.76,71.74 114.14,71.74 R18.1
  Bottom Layer w0.25: v1(53.38,59.12) 55.26,61 62.55,61 70.51,68.96 v1(107.64,68.96)
NetC56_2: C56.2 C57.2 C58.2 R22.2 U6.5 | length 8.7
  Top Layer w0.25: R22.2 103.71,64.16 C56.2 C57.2 C58.2 105.03,61.06 105.875,61.905 U6.5
NetC64_2: C64.2 C65.2 F4.2 U8.12 | length 6.3
  Top Layer w0.25: U8.12 75.941,44.24 76.791,45.09 C65.2 C65.2@77.76,45.09 ; F4.2 77.725,45.055 C65.2@77.76,45.09 ; C64.2@77.85,46.6 77.76,46.51 C65.2@77.76,45.09
NetC66_2: C66.2 J8.2 R27.1 | length 12.2
  Top Layer w0.27: J8.2@71.583,30.047 J8.2 71.583,33.759 72.29,34.467 v1(72.29,34.37) ; v1(73.81,34.36) 74.6,35.15 74.6,38.35 76,38.35 C66.2
  Bottom Layer w0.27: v1(72.29,34.37) 73.8,34.37 v1(73.81,34.36)
NetC67_2: C67.2 J8.3 R26.1 | length 10.1
  Top Layer w0.27: C67.2 72.95,38.25 R26.1 73.05,34.26 72.2,33.41 72.2,30.3 72.233,30.267 J8.3
NetC68_2: C68.2 U8.10 U8.11 U8.20 | length 18.6
  Top Layer w0.25: v1(70.37,46.69) 72.01,46.69 U8.20 ; U8.10 74.01,41.99 v1(74.9,41.1) 77.3,41.1 77.7,41.5 77.7,42.05 C68.2@77.75,42.1 ; U8.11 75.56,43.74 77.2,42.1 C68.2@77.75,42.1 ; C68.2@77.76,42.09 C68.2@77.75,42.1
  Bottom Layer w0.25: v1(70.37,46.69) 70.46,46.6 70.46,45.512 70.455,45.507 70.455,45.368 74.584,41.239 74.667,41.239 74.805,41.1 v1(74.9,41.1)
NetD1_1: D1.1 R3.1 | length 12.4
  Top Layer w0.25: D1.1 64.68,47.145 v1(64.68,48.28) ; R3.1 64.955,56.14 66.16,56.14 68.02,54.28 v1(68.02,52.76)
  Bottom Layer w0.25: v1(64.68,48.28) 68.02,51.62 v1(68.02,52.76)
NetJ5_2: J5.2 U3.5 | length 36.9
  Top Layer w0.27: J5.2 74.23,62.27 76.2,60.3 88.5,60.3 91.8,57 91.8,51.128 91.412,50.74 90.96,50.74 90.62,50.4 U3.5 U3.5@90.635,49.28
NetJ5_3: J5.3 U4.5 | length 33.7
  Top Layer w0.25: J5.3 73.6,68.99 73.6,62.2 75.92,59.88 82.123,59.88 83.208,58.795 84.355,58.795 86.99,56.16 86.99,53.28 86.095,52.385 86.095,50.75 85.53,50.185 84.885,50.185 84.6,49.9 U4.5
NetJ6_2: J6.2 R6.1 U1.57 | length 42.3
  Top Layer w0.25: J6.2 32.76,48.6 v1(32.77,48.59) ; v1(49.8,51.71) 49.8,51.79 50.21,52.2 U1.57
  Top Layer w0.27: U1.57 60.9,52.2 62,51.1 63.35,51.1 R6.1
  Bottom Layer w0.25: v1(32.77,48.59) 32.77,45.51 34.48,43.8 41.81,43.8 49.72,51.71 v1(49.8,51.71)
NetJ6_4: J6.4 R7.1 U1.63 | length 38.4
  Top Layer w0.25: 61.425,55.2 62.125,54.5 R7.1
  Top Layer w0.27: J6.4 30.45,47.33 30.95,46.83 40.707,46.83 41.627,47.75 v1(41.638,47.75) ; v1(53.14,55.2) U1.63 61.425,55.2
  Bottom Layer w0.27: v1(41.638,47.75) 41.64,47.75 49.09,55.2 v1(53.14,55.2)
NetJ6_6: J6.6 U1.77 | length 37.8
  Top Layer w0.25: J6.6 29,46.04 29.06,46.1 29.13,46.03 v1(33.64,46.03) ; v1(46.97,50.71) 57.19,60.93 57.19,62.13 ; 57.19,62.13 57.19,62.89 U1.77
  Bottom Layer w0.25: v1(33.64,46.03) 35.33,44.34 40.6,44.34 v1(46.97,50.71)
NetJ6_10: J6.10 R8.1 U1.58 | length 38.6
  Top Layer w0.27: J6.10 31.971,43.52 34.821,46.37 v1(41.58,46.37) ; v1(51.83,53.05) 52.18,52.7 U1.58 63.35,52.7 R8.1
  Bottom Layer w0.27: v1(41.58,46.37) 48.26,53.05 v1(51.83,53.05)
NetJ7_2: J7.2 J7.3 R11.1 | length 10.5
  Top Layer w0.25: J7.3@113.72,36.64 116.22,36.64 116.22,39.554 117.25,40.584 R11.1
NetJ7_4: J7.4 J7.5 R16.1 | length 10.9
  Top Layer w0.25: R16.1 102.21,39.08 104.56,36.73 106.038,36.73 106.22,36.912 106.22,36.64 J7.4@108.72,36.64
NetL2_1: L2.1 R9.2 | length 1.8
  Top Layer w0.25: R9.2 52.49,68.68 52.51,68.66 53.745,68.66 L2.1
NetR3_2: R3.2 U1.66 | length 4.3
  Top Layer w0.25: U1.66 61.26,56.7 61.72,56.24 63.345,56.24 R3.2
NetR26_2: R26.2 U8.8 | length 3
  Top Layer w0.25: U8.8 73.01,39.89 R26.2
NetR27_2: R27.2 U8.9 | length 3.5
  Top Layer w0.25: U8.9 73.51,41.39 74.503,40.397 74.503,39.947 R27.2@74.6,39.85
NetR28_1: R28.1 TX1.1 | length 10.9
  Top Layer w0.25: TX1.1 65.75,31.38 68.195,33.825 68.205,33.825 68.61,34.23 68.63,34.23 70,35.6 R28.1 R28.1@69.95,38.4
NetR29_1: R29.1 RX1.1 | length 12.2
  Top Layer w0.25: R29.1 77.6,31.8 79.7,29.7 79.7,28.2 79.375,27.875 RX1.1
NetRX1_2: RX1.2 U8.14 | length 18.4
  Top Layer w0.25: U8.14 75.544,45.24 v1(75.915,45.24) ; v1(75.99,36.62) 75.99,31.41 78.1,29.3 78.625,29.3 RX1.2
  Bottom Layer w0.25: v1(75.915,45.24) 75.953,45.203 75.953,36.657 v1(75.99,36.62)
NetTX1_2: TX1.2 U8.7 | length 18.3
  Top Layer w0.25: TX1.2 65.825,27.8 66.4,27.8 66.6,28 66.6,31.57 70.8,35.77 70.8,40.6 72.51,42.31 U8.7
NetU1_1: U1.1 U3.4 U4.4 | length 57.1
  Top Layer w0.25: U1.1 44.01,61.19 47.81,61.19 49.17,59.83 v1(55.18,59.83) ; v1(64.88,61.18) 64.88,61.257 73.964,61.257 75.75,59.47 81.932,59.47 83.515,57.887 83.515,50.09 83.95,49.655 v1(83.95,49.255) ; U3.4 89.97,49.27 v1(90,49.3)
  Bottom Layer w0.25: v1(55.18,59.83) 63.39,59.83 64.72,61.16 64.79,61.09 v1(64.88,61.18) ; v1(83.95,49.255) 83.995,49.3 v1(90,49.3)
NetU1_35: pad.2@28.38,36.61 U1.35 | length 28.8
  Top Layer w0.25: pad.2@28.38,36.61 34.61,36.61 36.08,38.08 39.48,38.08 43.77,42.37 49.3,42.37 50.2,43.27 U1.35
NetU1_36: U1.36
NetU1_52: U1.52 U2.1 | length 13.4
  Top Layer w0.27: U1.52 60.99,49.7 61.69,49 v1(66.3,49)
  Bottom Layer w0.27: v1(66.3,49) 66.4,49 70.46,53.06 v1(70.46,53.425)
NetU1_55: U1.55 U2.4 | length 11.7
  Top Layer w0.25: U2.4@70,49.615 U2.4
  Top Layer w0.27: U1.55 60.9,51.2 62.485,49.615 U2.4@70,49.615
NetU1_59: U1.59 U2.2 U2.3 | length 12.9
  Top Layer w0.25: U1.59 61.8,53.2 61.99,53.39 66.21,53.39 67.02,52.58 67.02,52.55 67.415,52.155 U2.2 U2.3
NetU1_70: U1.70 U3.2 | length 37.1
  Top Layer w0.27: U1.70 75.318,58.7 75.398,58.62 81.347,58.62 v1(81.974,57.994) ; v1(83.45,59.38) 84.56,59.38 87.85,56.09 87.85,53.73 88.81,52.77 90.35,52.77 90.62,52.5 U3.2
  Bottom Layer w0.27: v1@81.974,57.953 v1(81.974,57.994) 83.195,59.215 83.361,59.38 v1(83.45,59.38)
NetU1_72: U1.72 U4.2 | length 32.3
  Top Layer w0.27: U1.72 66.178,59.7 66.748,59.13 75.496,59.13 75.576,59.05 81.758,59.05 82.71,58.098 v1(82.71,53.09) ; U4.2 84.6,52.581 84.75,52.731 v1(84.75,52.82)
  Bottom Layer w0.27: v1(82.71,53.09) 84.457,53.09 84.727,52.82 v1(84.75,52.82)
VDDCORE: C21.2 C22.2 C23.2 C24.2 C25.2 C26.2 F1.1 F2.1 U1.4 U1.18 U1.22 U1.39 U1.76 | length 84.1
  Top Layer w0.2: v1(39.4,61.5) C21.2@39.45,61.45
  Top Layer w0.25: v1(39.4,48) 40.3,48 43,50.7 U1.22 ; v1(39.4,50.9) 40.7,50.9 42.5,52.7 U1.18 ; v1(39.4,61.5) 40.9,61.5 42.7,59.7 U1.4 ; C26.2@52.2,44.65 U1.39 ; U1.76 57.71,62.91 57.71,63.84 58.085,64.215 59.705,64.215 61.8,66.31 v1(61.8,67.2)
  Top Layer w1: v1(39.45,45.39) 39.45,44.94 v1(41.48,42.91)
  Bottom Layer w1: v1(39.4,60) v1(39.4,61.5) 39.4,61.6 46.71,68.91 v1(47.47,68.91) v1(58.7,68.91) 61.09,68.91 61.8,68.2 v1(61.8,67.2) ; v1@39.42,60 39.45,59.97 v1(39.45,45.39) ; v1(41.48,42.91) 50.6,42.91 52.225,44.535 v1(52.225,44.625)
VDDPLL: C27.2 F1.2 U1.86 | length 8.9
  Top Layer w0.25: U1.86 52.7,63.91 53.67,64.88 55.38,64.88 57.1,66.6 C27.2 57.13,67.25 58.7,67.25 F1.2
VDDUTMIC: C28.2 F2.2 U1.96 | length 6.5
  Top Layer w0.25: F2.2@47.545,67.28 C28.2 49.1,65.66 47.7,64.26 U1.96
pads on no net: J1. J2.0 J2.2 J2.3 J2.4 J4. J6.7 J6.8 J6.9 J7. J8.0 J8.1 J8.4 U1.2 U1.11 U1.12 U1.13 U1.14 U1.15 U1.17 U1.20 U1.21 U1.23 U1.24 U1.25 U1.26 U1.27 U1.30 U1.31 U1.32 U1.33 U1.34 U1.37 U1.38 U1.40 U1.41 U1.42 U1.43 U1.44 U1.45 U1.46 U1.48 U1.50 U1.51 U1.53 U1.54 U1.56 U1.61 U1.62 U1.64 U1.65 U1.69 U1.71 U1.74 U1.75 U1.78 U1.79 U1.80 U1.82 U1.83 U1.84 U1.85 U1.87 U1.88 U1.89 U1.91 U1.92 U1.94 U1.95 U1.97 U1.100 U8.2 U8.4 U8.5 U8.6 U8.15 U8.16 U8.18 U8.19
copper on no net:
  other v2: 30,27.7 122,27.7 28.374,28.374 31.626,28.374 120.374,28.374 123.626,28.374 27.7,30 32.3,30 119.7,30 124.3,30 28.374,31.626 31.626,31.626 120.374,31.626 123.626,31.626 30,32.3 122,32.3 30,67.2 122,67.2 28.374,67.874 31.626,67.874 120.374,67.874 123.626,67.874 27.7,69.5 32.3,69.5 119.7,69.5 124.3,69.5 28.374,71.126 31.626,71.126 120.374,71.126 123.626,71.126 30,71.8 122,71.8

## Polygon pours and split planes (outlines as drawn)
GND on Top Layer "TOP GND" (solid, pour order 5): 123.46,26 ccw(c123.46,28.54) 126,28.54 126,70.96 ccw(c123.46,70.96) 123.46,73.5 28.54,73.5 ccw(c28.54,70.96) 26,70.96 26,28.54 ccw(c28.54,28.54) 28.54,26
5V on Top Layer "Top Layer-5V" (solid, pour order 4): 82.2,37.5 ccw(c83.96,37.5) 83.96,35.74 87.554,35.74 ccw(c87.554,36.586) 88.4,36.586 88.4,37.039 cw(c89.142,37.039) 89.142,37.78 93.38,37.78 ccw(c93.38,38.7) 94.3,38.7 94.3,43.094 cw(c96.84,43.094) 95.044,44.89 95.152,44.999 ccw(c94.313,45.838) 95.5,45.838 95.5,60.84 ccw(c92.96,60.84) 94.756,62.637 94.631,62.761 cw(c95.19,63.32) 94.4,63.32 94.4,67.428 ccw(c93.228,67.428) 93.228,68.6 80.9,68.6 cw(c80.9,70.8) 78.7,70.8 78.7,71.779 ccw(c77.979,71.779) 77.979,72.5 76.4,72.5 ccw(c76.4,71.8) 75.7,71.8 75.7,63.14 ccw(c78.24,63.14) 78.24,60.6 89.66,60.6 cw(c89.66,58.06) 92.2,58.06 92.2,50.962 cw(c91.366,50.962) 91.366,50.129 91.323,50.129 ccw(c91.323,49.905) 91.1,49.905 91.1,48.9 cw(c90.7,48.9) 90.7,48.5 89.908,48.5 cw(c89.908,48.907) 89.502,48.907 89.502,49.285 ccw(c88.837,49.285) 88.837,49.95 85.167,49.95 ccw(c85.167,49.841) 85.059,49.841 85.059,47.441 ccw(c85.6,47.441) 85.6,46.9 88.465,46.9 cw(c88.465,46.269) 89.097,46.269 89.097,43.078 cw(c88.602,43.078) 88.602,42.583 ccw(c88.602,41.881) 87.9,41.881 87.9,41.25 cw(c87.28,41.25) 87.28,40.63 cw(c87.28,41.21) 86.7,41.21 86.7,41.8 ccw(c85.9,41.8) 85.9,42.6 82.9,42.6 ccw(c82.9,41.9) 82.2,41.9
GND on Bottom Layer "BTM GND" (solid, pour order 7): 123.46,26 ccw(c123.46,28.54) 126,28.54 126,70.96 ccw(c123.46,70.96) 123.46,73.5 28.54,73.5 ccw(c28.54,70.96) 26,70.96 26,28.54 ccw(c28.54,28.54) 28.54,26
CPU_3V3 on 3V3 (split plane): 28.54,72.99 95.998,72.99 95.998,26.51 28.54,26.51 28.524,26.509 28.341,26.518 28.144,26.547 27.95,26.596 27.762,26.663 27.582,26.748 27.411,26.851 27.251,26.969 27.103,27.103 26.969,27.251 26.851,27.411 26.748,27.582 26.663,27.762 26.596,27.95 26.547,28.144 26.518,28.341 26.509,28.524 26.51,28.54 26.51,70.96 26.509,70.976 26.518,71.159 26.547,71.356 26.596,71.55 26.663,71.738 26.748,71.918 26.851,72.089 26.969,72.249 27.103,72.397 27.251,72.531 27.411,72.649 27.582,72.752 27.762,72.837 27.95,72.904 28.144,72.953 28.341,72.982 28.524,72.991
+5V_AUDIO on 3V3 (split plane): 123.659,72.982 123.856,72.953 124.05,72.904 124.238,72.837 124.418,72.752 124.589,72.649 124.749,72.531 124.897,72.397 125.031,72.249 125.149,72.089 125.252,71.918 125.337,71.738 125.404,71.55 125.453,71.356 125.482,71.159 125.491,70.976 125.49,70.96 125.49,28.54 125.491,28.524 125.482,28.341 125.453,28.144 125.404,27.95 125.337,27.762 125.252,27.582 125.149,27.411 125.031,27.251 124.897,27.103 124.749,26.969 124.589,26.851 124.418,26.748 124.238,26.663 124.05,26.596 123.856,26.547 123.659,26.518 123.476,26.509 123.46,26.51 96.202,26.51 96.202,72.99 123.46,72.99 123.476,72.991
GND on GND (split plane): 28.54,72.99 95.998,72.99 95.998,26.51 28.54,26.51 28.524,26.509 28.341,26.518 28.144,26.547 27.95,26.596 27.762,26.663 27.582,26.748 27.411,26.851 27.251,26.969 27.103,27.103 26.969,27.251 26.851,27.411 26.748,27.582 26.663,27.762 26.596,27.95 26.547,28.144 26.518,28.341 26.509,28.524 26.51,28.54 26.51,70.96 26.509,70.976 26.518,71.159 26.547,71.356 26.596,71.55 26.663,71.738 26.748,71.918 26.851,72.089 26.969,72.249 27.103,72.397 27.251,72.531 27.411,72.649 27.582,72.752 27.762,72.837 27.95,72.904 28.144,72.953 28.341,72.982 28.524,72.991
AGND on GND (split plane): 123.659,72.982 123.856,72.953 124.05,72.904 124.238,72.837 124.418,72.752 124.589,72.649 124.749,72.531 124.897,72.397 125.031,72.249 125.149,72.089 125.252,71.918 125.337,71.738 125.404,71.55 125.453,71.356 125.482,71.159 125.491,70.976 125.49,70.96 125.49,28.54 125.491,28.524 125.482,28.341 125.453,28.144 125.404,27.95 125.337,27.762 125.252,27.582 125.149,27.411 125.031,27.251 124.897,27.103 124.749,26.969 124.589,26.851 124.418,26.748 124.238,26.663 124.05,26.596 123.856,26.547 123.659,26.518 123.476,26.509 123.46,26.51 96.202,26.51 96.202,72.99 123.46,72.99 123.476,72.991

## Other copper
3V3 (plane layer: these items are gaps in the copper):
  lines w0.2: 96.1,26 96.1,73.5
GND (plane layer: these items are gaps in the copper):
  lines w0.2: 96.1,25.6 96.1,73.9

## Silkscreen, mask and mechanical layers (free items; w line width, h text height)
Top Overlay:
  circle w0.2: c30.2,42.7 r0.1
  lines w0.136: 87.135,61.763 87.192,61.827 cw(c87.431,61.588) 87.431,61.926 cw(c87.431,61.67) 87.612,61.851 cw(c87.209,61.448) 87.779,61.448 87.779,61.312 ccw(c88.131,61.312) 87.882,61.063 ccw(c88.575,61.756) 88.575,60.776 88.793,60.776 88.99,60.776
  lines w0.3: 39.3,67.55 42.3,64.55 ; 39.35,42.8 42.35,45.8 ; 61.1,45.85 64.1,42.85 ; 64.05,67.6 61.05,64.6 ; 96.1,26 96.1,73.5 ; 61.05,64.6 42.3,64.6 42.3,45.85 48.9,45.85 61.05,45.85 61.05,64.6
  text "CLK" at 72.1,66.8 h0.8 r90
  text "+5V" at 77.3,66.8 h0.8 r90
  text "GND" at 69.59,66.75 h0.8 r90
  text "DATA" at 74.6,66 h0.8 r90
  text "Dream" at 63.84,61.76 h6
  text "Light" at 76.521,61.167 h6
  text "+5V" at 27.33,60.19 h0.8
  text "POWER" at 62.7,48.2 h2.5
  text "SWD" at 31.03,48.09 h2.5 r270
  text "FTDI" at 70.19,47.47 h0.8
  text "Tor Brodtkorb" at 95.15,44.11 h3 r90
  text "GND" at 30.01,39.97 h1.5
  text "AUX IN" at 108.35,39.45 h2.5
  text "DMX" at 40.6,39.1 h2.5
  text "CONTROL" at 52.5,39.1 h2.5
  text "+3V3" at 30.01,38.72 h1.5
  text "+5V" at 30.01,37.46 h1.5
  text "ERASE" at 30.01,36.22 h1.5
  text "u" at 70.05,33.95 h5 r270
  text "RX" at 79,30.4 h0.8 r90
  text "TX" at 66.2,30.3 h0.8 r90
  text "+5V" at 90.9,27.6 h2.5
Top Solder:
  region: 91.49,64.38 88.99,64.38 88.99,64.08 91.49,64.08
  region: 91.49,63.955 88.99,63.955 88.99,63.655 91.49,63.655
  region: 91.49,63.53 88.99,63.53 88.99,63.23 91.49,63.23
  region: 91.49,63.105 88.99,63.105 88.99,62.805 91.49,62.805
  region: 91.49,62.68 88.99,62.68 88.99,62.38 91.49,62.38
  region: 91.49,62.255 88.99,62.255 88.99,61.955 91.49,61.955
  region: 91.49,61.83 88.99,61.83 88.99,61.53 91.49,61.53
  region: 91.49,61.405 88.99,61.405 88.99,61.105 91.49,61.105
  region: 91.49,60.98 88.99,60.98 88.99,60.68 91.49,60.68